# EAGLE board sch (EAGLE 7.2.0)
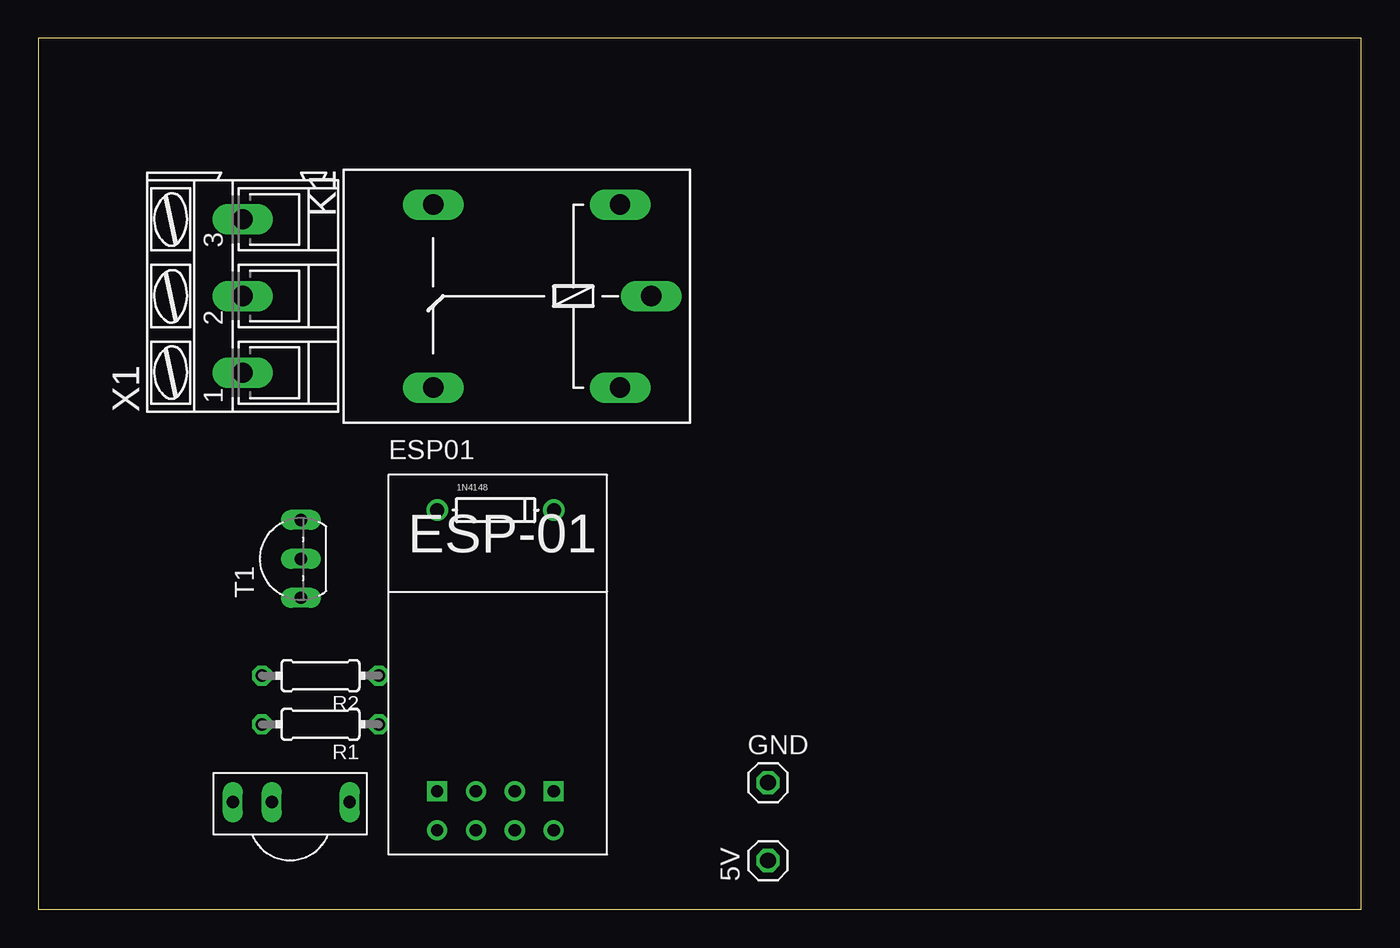
[diagram p0: board, top side]
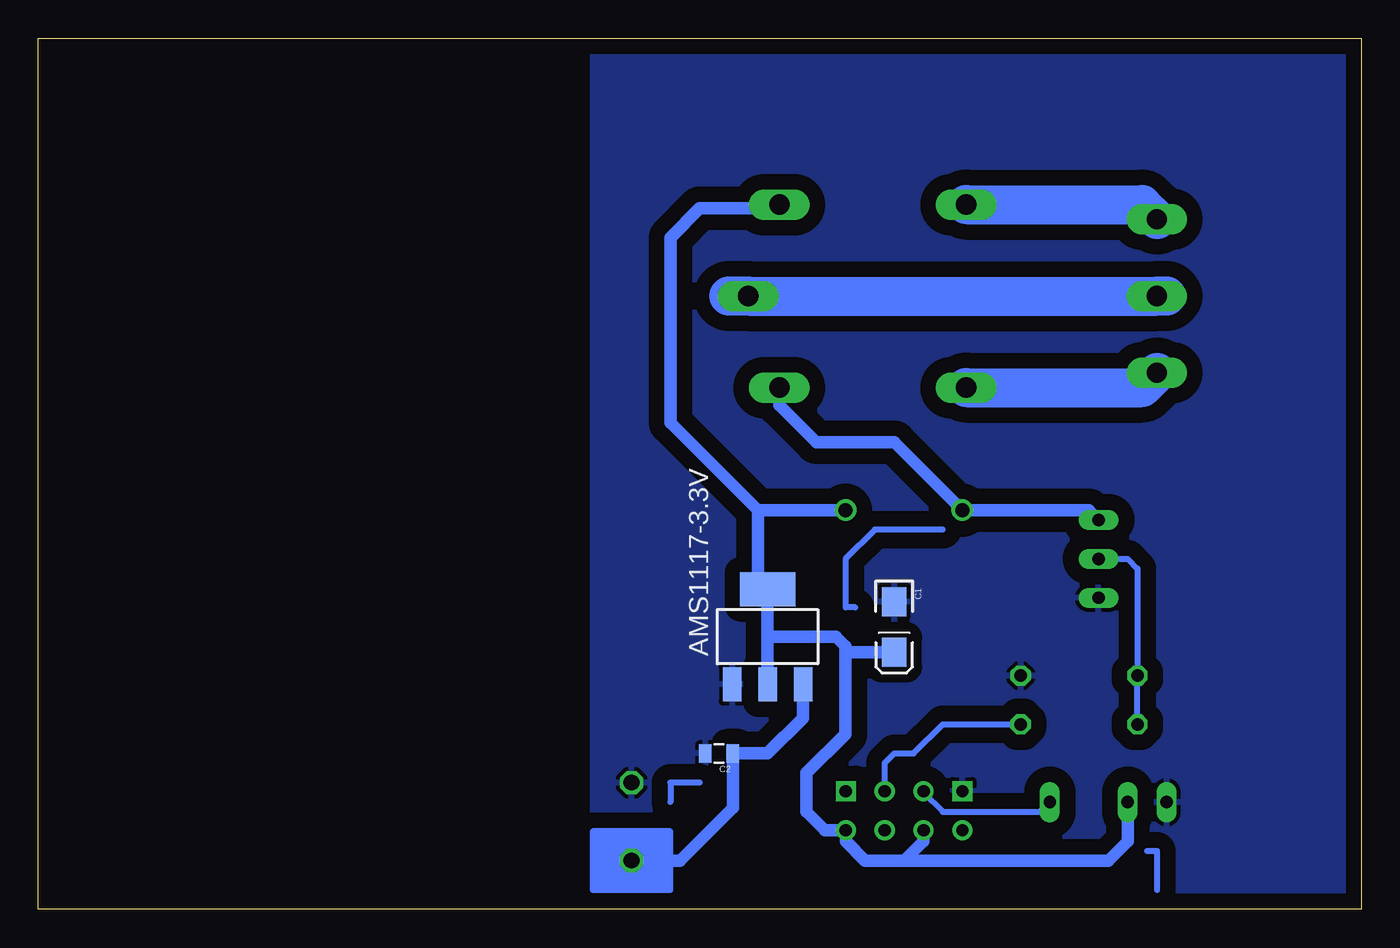
[diagram p1: board, bottom side, seen from below]

Size 86.34 x 56.82 mm. Coordinates in mm from the lower left corner, seen from the top.
Outline: 0,0 86.34,0 86.34,56.82 0,56.82 0,0
Copper layers (1*16): Top 0.035mm / dielectric 1.5mm / Bottom 0.035mm
Design rules "default": minimum track width 10mil, minimum drill 24mil, track to track 8mil, track to pad 8mil, pad to pad 8mil, via to via 8mil, smd to smd 8mil, copper to edge 40mil, drill to drill 8mil, minimum pad ring 10mil, minimum via ring 8mil, stop-mask expansion 4mil, vias tented up to drill 0mil, thermal gap 10mil
Net classes: 0 default: clearance 1.016 mm; 1 ac: clearance 2.54 mm; 2 5v: clearance 1.016 mm

## Footprints (pad centres in the part's own frame; a part is rotated, then mirrored left to right if it is on the bottom)
DO-1N4148 = drill 0.9: A -3.81,0; C 3.81,0
1X01 = drill 1.016 octagon: 1 0,0
SOT223 = smd 1.219 x 2.235: 1 -2.311,-3.099; 2 0,-3.099; 3 2.311,-3.099 | smd 3.6 x 2.2: TAB 0,3.099
EIA3216-KIT = smd 1.9 x 1.6: A 1.65,0; C -1.65,0
0805 = smd 0.8 x 1.2: 1 -0.9,0; 2 0.9,0
ESP01 = drill 0.8: CH_PD -1.285,-8.178; GPIO0 1.255,-5.638; GPIO2 -1.285,-5.638; RST 1.255,-8.178; TX -3.825,-8.178; VCC 3.795,-8.178 | drill 0.8 square: GND -3.825,-5.638; RX 3.795,-5.638
G5LE = drill 1.321 long: 1 -7.493,-5.969; 2 -7.493,5.969; O 4.699,5.969; P -9.525,0; S 4.699,-5.969
0204/7 = drill 0.813 octagon: 1 -3.81,0; 2 3.81,0
TO92-EBC-OVAL = drill 0.813 long: B 0,-1.27; C 2.54,-1.27; E -2.54,-1.27
TSOP17XX = drill 0.813 long: GND -3.81,0; OUT 3.81,0; V+ -1.27,0
AK300/3 = drill 1.321 long: 1 -5.004,0; 2 0,0; 3 5.004,0

## Placement (x,y rotation side)
1N4148  [DO-1N4148]  29.84,26.04 0 top
5V  [1X01]  47.62,3.17 90 top
AMS1117-3.3V  LM1117IMPX-3.3  [SOT223]  38.73,17.78 0 bottom
C1  22uF  [EIA3216-KIT]  30.48,18.41 270 bottom
C2  10uF  [0805]  41.91,10.16 180 bottom
ESP01  ESP01  [ESP01]  29.84,13.34 0 top
GND  [1X01]  47.62,8.26 0 top
K1  G5LE  [G5LE]  30.48,40.01 180 top
R1  1k  [0204/7]  18.41,12.07 180 top
R2  10k  [0204/7]  18.41,15.24 180 top
T1  2N2222  [TO92-EBC-OVAL]  15.88,22.86 90 top
U$1  TSOP1736  [TSOP17XX]  16.51,6.98 0 top
X1  [AK300/3]  13.33,40.01 90 top

## Library data of the parts
1N4148 T1 = adafruit
5V GND = pinhead
AMS1117-3.3V = lm1117
C1 C2 = SparkFun-Passives
ESP01 = esp8266modules
K1 = relay; OC_FARNELL: unknown; OC_NEWARK: unknown
R1 R2 = rcl
U$1 = tsop
X1 = con-ptr500; OC_FARNELL: unknown; OC_NEWARK: unknown

## Nets
3.3V: 1N4148.C AMS1117-3.3V.2 AMS1117-3.3V.TAB C1.A ESP01.CH_PD ESP01.VCC K1.1 U$1.V+
5V [5v]: 5V.1 AMS1117-3.3V.3 C2.1
COM [ac]: K1.P X1.2
GND: AMS1117-3.3V.1 C1.C C2.2 ESP01.GND GND.1 R2.1 T1.E U$1.GND
GPIO0: ESP01.GPIO0 R1.1
GPIO2: ESP01.GPIO2 U$1.OUT
N$1: R1.2 R2.2 T1.B
N$2: 1N4148.A K1.2 T1.C
NC [ac]: K1.O X1.1
NO [ac]: K1.S X1.3
RST: ESP01.RST

## Tracks (layer width: path | path; a pad name or v marks a point on that pad's centre or on a via)
3.3V
  Bottom 0.813: AMS1117-3.3V.2 38.73,17.78 | 38.73,17.78 AMS1117-3.3V.TAB 39.37,21.51 39.37,26.04 | 29.84,3.17 32.38,3.17 33.64,4.43 ESP01.VCC 35,5.16 36.2,6.35 36.2,8.89 33.66,11.43 33.66,16.51 | 29.84,3.17 28.57,4.45 28.57,5.14 ESP01.CH_PD | U$1.V+ 15.24,4.45 16.51,3.17 29.84,3.17 | 1N4148.C 39.37,26.04 | K1.1 38.23,45.72 43.18,45.72 45.09,43.82 45.09,31.75 39.37,26.04 | 33.66,16.51 33.66,17.14 34.29,17.78 38.73,17.78 | C1.A 33.4,16.77 33.66,16.51
5V
  Bottom 0.813: AMS1117-3.3V.3 36.42,12.47 38.73,10.16 C2.1 41.01,6.62 44.45,3.17 5V.1
COM
  Bottom 2.54: 41.27,40.01 K1.P X1.2 12.7,40.01
GND
  pour Bottom: -1.27,59.05 50.16,59.05 50.16,-1.9 -1.27,-1.9
GPIO0
  Bottom 0.406: ESP01.GPIO0 31.1,9.54 30.48,10.16 29.21,10.16 27.3,12.07 R1.1
GPIO2
  Bottom 0.406: ESP01.GPIO2 28.56,7.61 27.3,6.35 20.95,6.35 U$1.OUT
N$1
  Bottom 0.406: T1.B 15.24,22.86 14.61,22.22 R2.2 R1.2
N$2
  Bottom 0.813: K1.2 37.97,32.89 35.56,30.48 30.48,30.48 1N4148.A 17.78,26.04 T1.C
N$3
  Bottom 0.406: 43.18,8.26 45.09,8.26 45.09,6.98
N$4
  Bottom 0.406: 27.3,24.76 31.75,24.76 33.66,22.86 33.66,19.68 33.02,19.68
N$5
  Bottom 0.406: 13.97,3.81 13.33,3.81 13.33,1.27
N$6
  Bottom 0.406: 45.09,5.08 50.16,5.08 50.16,1.27 45.09,1.27 45.09,5.08
NC
  Bottom 2.54: K1.O 14.3,34.04 X1.1
NO
  Bottom 2.54: K1.S 14.3,45.97 X1.3
(copper drawn outside any net)
  shapes: Bottom area x1